# Altium PCB PCB1.PcbDoc
Units mil, origin at the board's own origin, x right, y up, seen from the top; angles counter-clockwise.
Board outline 3785 x 1815 mil, 2 copper layers (Top Layer, Bottom Layer); 5 components, 8 nets, 24 pads, 0 vias.
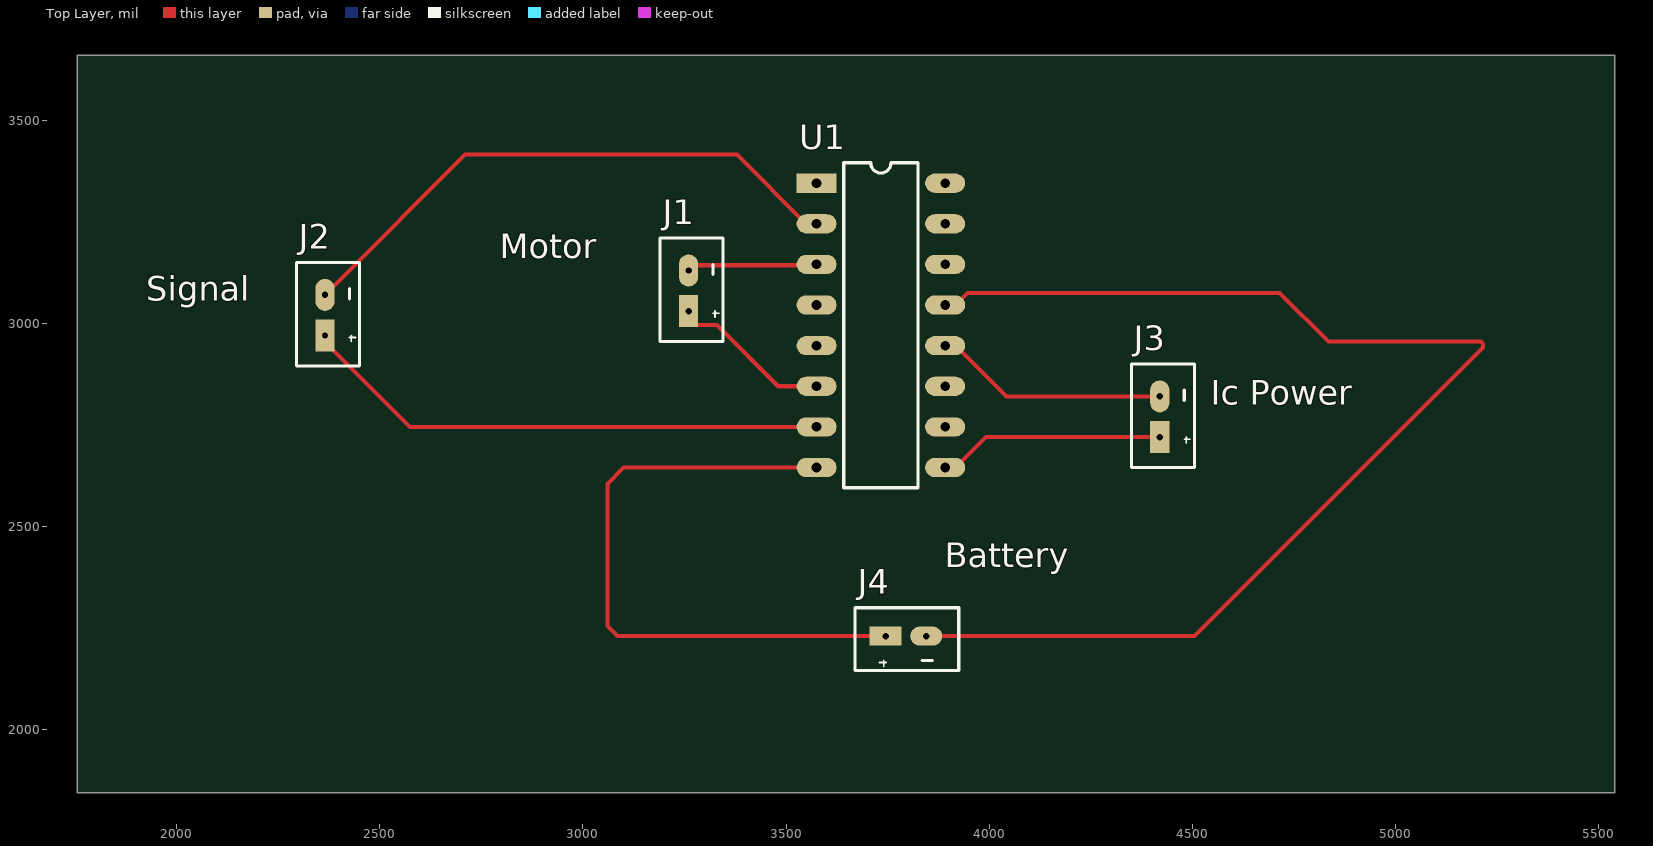
[diagram p0: Top Layer view]
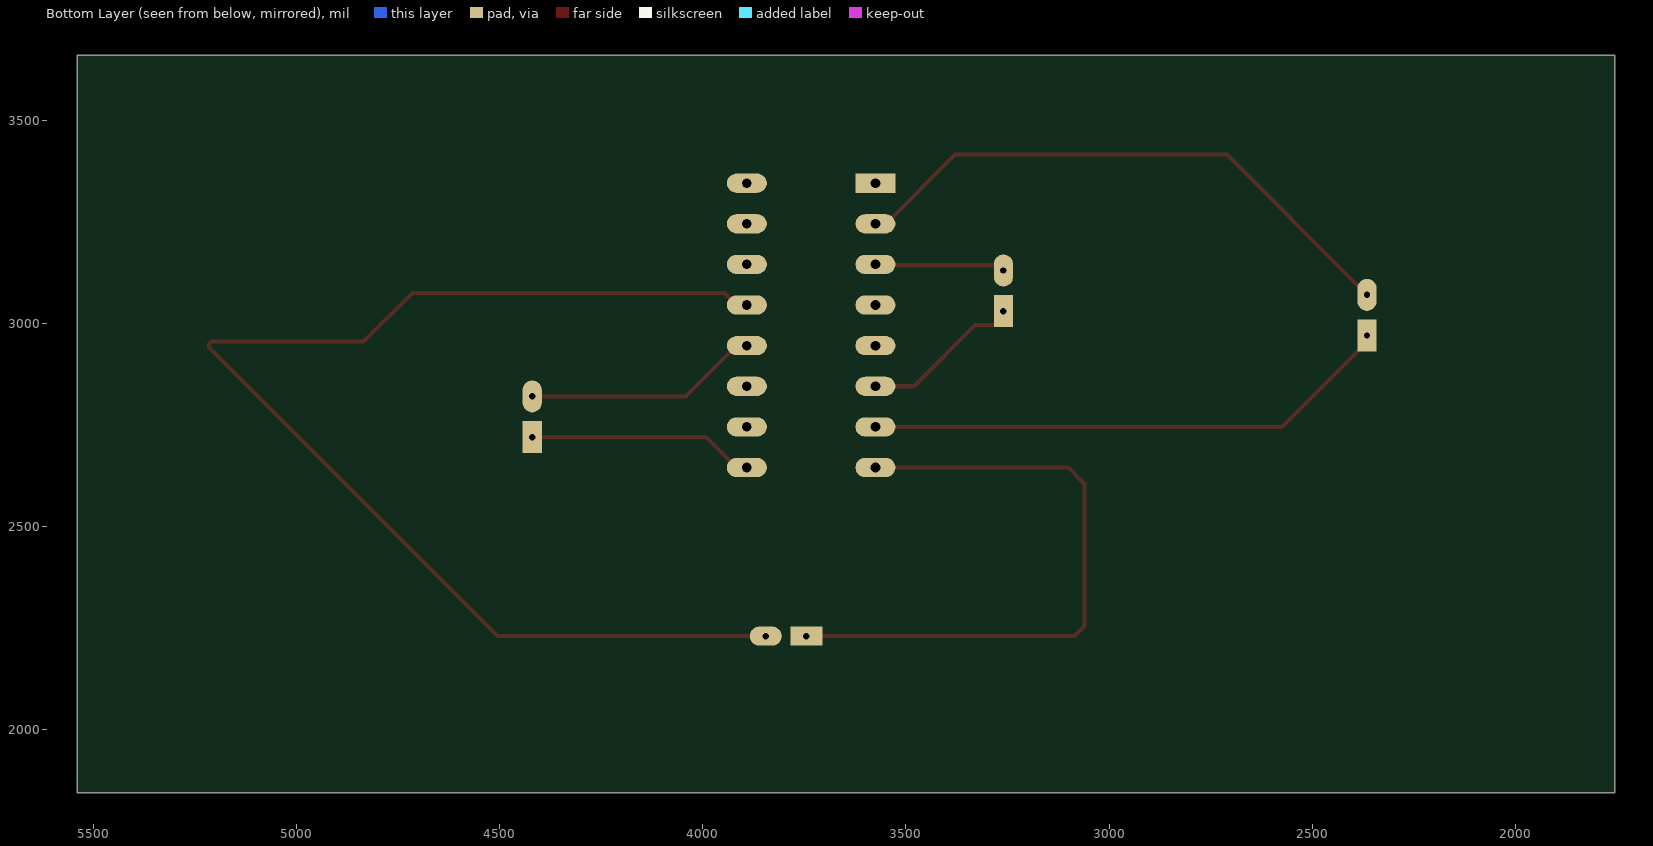
[diagram p1: Bottom Layer view, seen from below]
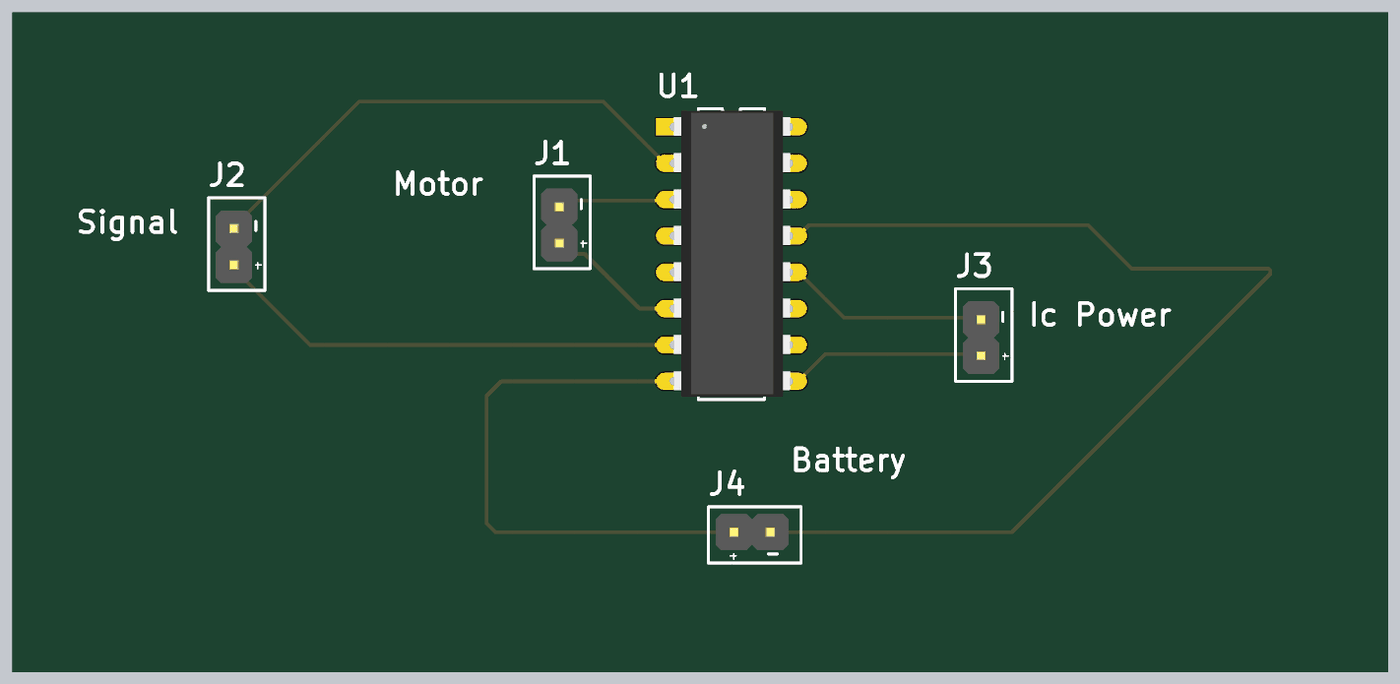
[diagram p2: 3D render of the assembled board from above, using the file's embedded part models]

## Layer stack, top to bottom
Top Solder: solder mask 0.4, Solder Resist, Dk 3.5
Top Layer: signal copper 1.4
Dielectric 1: dielectric 12.6, FR-4, Dk 4.8
Bottom Layer: signal copper 1.4
Bottom Solder: solder mask 0.4, Solder Resist, Dk 3.5

## Board outline
1755,1845 5540,1845 5540,3660 1755,3660

## Design rules (kind name [scope] priority, off if disabled: settings)
Clearance [All] p1: gap=10 ignorepadtopadclearanceinfootprint=FALSE
PolygonConnect [All] p1: connectstyle=Relief reliefconductorwidth=10 reliefentries=4 polygonreliefangle="90 Angle" airgapwidth=10
RoutingVias [All] p1: holewidth=28 width=50 viastyle="Through Hole" minholewidth=28 minwidth=50 maxholewidth=28 maxwidth=50
SolderMaskExpansion [All] p1: expansion=4 istentingtop=FALSE
Width [All] p1: maxlimit=10 minlimit=10 preferedwidth=10
30 further rules are at their usual default settings.

## Components (designator, comment, footprint, x,y, rotation, side; value= is the part's Value field where it differs from the comment)
J1 "Motor" HEAD 3260,3030 r90 top
J2 "Signal" HEAD 2365,2970 r90 top
J3 "Ic_power" HEAD 4420,2720 r90 top
J4 "Battery" HEAD 3745,2230 r0 top
U1 "L293D" L293d 3560,3345 r0 top

## Footprints (in the part's own frame and the unit in brackets; to place one, negate y for a bottom-side part, rotate by r counter-clockwise, add the part's x,y. Pads: shape width x height; smd on the part's side, far side on the other; paste and mask are expansions set on the pad)
HEAD [mm]
  rect 2x1.2 hole 0.4: 1(0,0)
  oval 2x1.2 hole 0.4: 2(2.54,0)
  silkscreen extent -1.91,-2.16 4.57,1.78, body extent -1.4,-1.27 3.68,1.27, height 8.38
L293d [mm]
  rect 2.5x1.2 hole 0.6: 1(0.381,0)
  oval 2.5x1.2 hole 0.6: 2(0.381,-2.54) 3(0.381,-5.08) 4(0.381,-7.62) 5(0.381,-10.16) 6(0.381,-12.7) 7(0.381,-15.24) 8(0.381,-17.78) 9(8.419,-17.78) 10(8.419,-15.24) 11(8.419,-12.7) 12(8.419,-10.16) 13(8.419,-7.62) 14(8.419,-5.08) 15(8.419,-2.54) 16(8.419,0)
  silkscreen extent 2.08,-19.05 6.71,1.27, body extent 0.38,-18.85 8.51,1.14, height 5.24

## Part data
J1 J2 J3 J4: library part PPPC021LFBN-RC, "Board Connector, 2 Contact(s), 1 Row(s), Female, Straight, 0.1 inch Pitch, Solder Terminal, Locking", Manufacturer=Sullins, Manufacturer Series=PP, Rated Current (Signal)=3A, Supplier Part Number=S7035-ND, Body Breadth=0.094inch, Body Depth=0.334inch, Body Length=0.22inch, Category=Connectors, ComponentLink1Description=https://datasheet.ciiva.com:443/pdfs/VipMasterIC/IC/SUCS/SUCSS00270/SUCSS00270-1.pdf?src-supplier=IHS+Markit, ComponentLink1URL=https://datasheet.ciiva.com:443/pdfs/VipMasterIC/IC/SUCS/SUCSS00270/SUCSS00270-1.pdf?src-supplier=IHS+Markit, ComponentLink2Description=https://media.digikey.com/pdf/Data%20Sheets/Sullins%20PDFs/Female_Headers.100_DS.pdf?src-supplier=Digikey, ComponentLink2URL=https://media.digikey.com/pdf/Data%20Sheets/Sullins%20PDFs/Female_Headers.100_DS.pdf?src-supplier=Digikey, ComponentLink3Description=http://www.sullinscorp.com/catalogs/78_Page80-81_HEADER_.100_2.54mm_FEMALE.pdf?src-supplier=Future+Electronics, ComponentLink3URL=http://www.sullinscorp.com/catalogs/78_Page80-81_HEADER_.100_2.54mm_FEMALE.pdf?src-supplier=Future+Electronics, ComponentLink4Description=https://datasheet.octopart.com/PPPC021LFBN-RC-Sullins-datasheet-41308905.pdf?src-supplier=Future+Electronics, ComponentLink4URL=https://datasheet.octopart.com/PPPC021LFBN-RC-Sullins-datasheet-41308905.pdf?src-supplier=Future+Electronics, Connector Type="BOARD CONNECTOR", Contact Finish - Mating=AU, Contact Gender=Female, Contact Material=Bronze, Contact Pattern=RECTANGULAR, Contact Style="SQ PIN-SKT", Insulation Material=Polyester, Manufacturer Part Number=PPPC021LFBN-RC, Mating Contact Pitch=0.1inch, Mounting Option 1=LOCKING, Mounting Style=STRAIGHT, Mounting Technology=Board, Number Of Connectors=1, Number of Contacts=2, Number Of PCB Rows=1, Number of Rows Loaded=1, PCB Contact Pattern=RECTANGULAR, Polarization Key="POLARIZED HOUSING", Pricing="1=0.34, 10=0.287, 100=0.223, 500=0.1911, 1000=0.15925, 5000=0.1365, 10000=0.13 (USD)", Reach SVHC Compliant=Yes, Reference Standard=UL, Reliability=COMMERCIAL, RoHS=Yes, RoHS Compliant=Yes, Stock=20345, Supplier=Digikey, Terminal Length=0.125inch, Terminal Pitch=2.54mm, Termination=Solder
U1: "Half Bridge Based Peripheral Driver, 1.2A, PDIP16", Case/Package=DIP, Manufacturer=STMicroelectronics, Max Supply Voltage=36V, Min Supply Voltage=4.5V, Nominal Supply Voltage=5V, Output Current Flow Direction="SOURCE AND SINK", Output Peak Current Limit-Nom=1.2A, Package Body Material=Plastic, Package Shape=Rectangular, Package Style=IN-LINEMeter, Supplier Part Number=2116481, Supply Voltage1-Nom=24V, Built-in Protections=TRANSIENT,THERMAL, Category="Motor Drivers", Channels=2, ComponentLink1Description=https://datasheet.ciiva.com:443/pdfs/VipMasterIC/IC/SGST/SGSTS19357/SGSTS19357-1.pdf?src-supplier=IHS+Markit, ComponentLink1URL=https://datasheet.ciiva.com:443/pdfs/VipMasterIC/IC/SGST/SGSTS19357/SGSTS19357-1.pdf?src-supplier=IHS+Markit, ComponentLink2Description=https://datasheet.ciiva.com/14150/ocl293d-647107-dat-en-14150297.pdf?src-supplier=Distrelec, ComponentLink2URL=https://datasheet.ciiva.com/14150/ocl293d-647107-dat-en-14150297.pdf?src-supplier=Distrelec, ComponentLink3Description=https://datasheet.ciiva.com/15109/getdatasheetpartid-121660-15109379.pdf?src-supplier=Verical, ComponentLink3URL=https://datasheet.ciiva.com/15109/getdatasheetpartid-121660-15109379.pdf?src-supplier=Verical, ComponentLink4Description=https://datasheet.ciiva.com/29307/156134-da-01-en-4-kanal-treiber-ic-l293d-stm-29307000.pdf?src-supplier=Conrad, ComponentLink4URL=https://datasheet.ciiva.com/29307/156134-da-01-en-4-kanal-treiber-ic-l293d-stm-29307000.pdf?src-supplier=Conrad, ComponentLink5Description=https://datasheet.ciiva.com/1955/cd00000059-1955400.pdf?src-supplier=Digikey, ComponentLink5URL=https://datasheet.ciiva.com/1955/cd00000059-1955400.pdf?src-supplier=Digikey, ComponentLink6Description=https://datasheet.ciiva.com/4895/cd00000059-4895945.pdf?src-supplier=Mouser, ComponentLink6URL=https://datasheet.ciiva.com/4895/cd00000059-4895945.pdf?src-supplier=Mouser, ComponentLink7Description=https://datasheet.ciiva.com/16458/cd00000059-16458220.pdf?src-supplier=Future+Electronics, ComponentLink7URL=https://datasheet.ciiva.com/16458/cd00000059-16458220.pdf?src-supplier=Future+Electronics, Height - Seated (Max)=5.1mm, Input Characteristics=STANDARD, Interface IC Type="HALF BRIDGE BASED PERIPHERAL DRIVER", JESD-30 Code=R-PDIP-T16, JESD-609 Code=e3, Length=20mm, Manufacturer Part Number=L293D, Output Characteristics=3-STATE, Output Polarity=True, Pins=16, Pricing="25=4.14, 100=4.02, 375=3.9, 625=3.85, 1250=3.71 (USD)", Qualification Status="Not Qualified", Reach SVHC Compliant=No, RoHS=Yes, RoHS Compliant=Yes, Stock=1325, Supplier="Future Electronics", Supply Voltage1-Max=36V, Supply Voltage1-Min=4.5V, Surface Mount=No, Terminal Finish=Tin, Terminal Form="Through Hole", Terminal Pitch=2.54mm, Terminal Position=DUAL, Width=7.62mm

## Nets (pads, with @x,y where several pads share a name; then routed paths per layer and width w, separated by ;. In a path a pad name is that pad's centre, name@x,y a point inside that pad or via, vN(x,y) a via of type N, cw(c..) or ccw(c..) an arc to the next point about the centre after c; other vN are vias at no path point)
NetJ1_1: J1.1 U1.6 | length 400.9
  Top Layer w10: J1.1 3260,3014.25 3278.62,2995.63 3330.1,2995.63 3480.73,2845 U1.6
NetJ1_2: J1.2 U1.3 | length 321.2
  Top Layer w10: J1.2 3272.87,3142.87 3572.87,3142.87 U1.3
NetJ2_1: J2.1 U1.7 | length 1312.4
  Top Layer w10: J2.1 2365,2954.25 2574.25,2745 U1.7
NetJ2_2: J2.2 U1.2 | length 1426.6
  Top Layer w10: J2.2 2365,3075.67 2382.2,3092.87 2387.87,3092.87 2710,3415 3379.41,3415 3549.41,3245 U1.2
NetJ3_1: J3.1 U1.9 | length 559.6
  Top Layer w10: U1.9 3917.05,2645 3992.05,2720 J3.1
NetJ3_2: J3.2 U1.12 | length 580.3
  Top Layer w10: U1.12 3917.05,2945 4042.05,2820 J3.2
NetJ4_1: J4.1 U1.8 | length 1576.9
  Top Layer w10: U1.8 3100,2645 3060,2605 3060,2255 3085,2230 J4.1
NetJ4_2: J4.2 U1.13 | length 3062.5
  Top Layer w10: J4.2 4505,2230 5215.86,2940.86 5215.86,2949.14 5210,2955 4835,2955 4715,3075 3947.05,3075 3917.05,3045 U1.13
pads on no net: U1.1 U1.4 U1.5 U1.10 U1.11 U1.14 U1.15 U1.16

## Silkscreen, mask and mechanical layers (free items; w line width, h text height)
Top Overlay:
  text "Motor" at 2795,3160 h60
  text "Signal" at 1925,3054.99 h60
  text "Ic Power" at 4545,2800 h60
  text "Battery" at 3890,2399.99 h60